# Altium PCB PCB_Uc1.PcbDoc
Units mm, origin at the board's own origin, x right, y up, seen from the top; angles counter-clockwise.
Board outline 100 x 100 mm, 2 copper layers (Top Layer, Bottom Layer); 37 components, 77 nets, 257 pads, 19 vias.
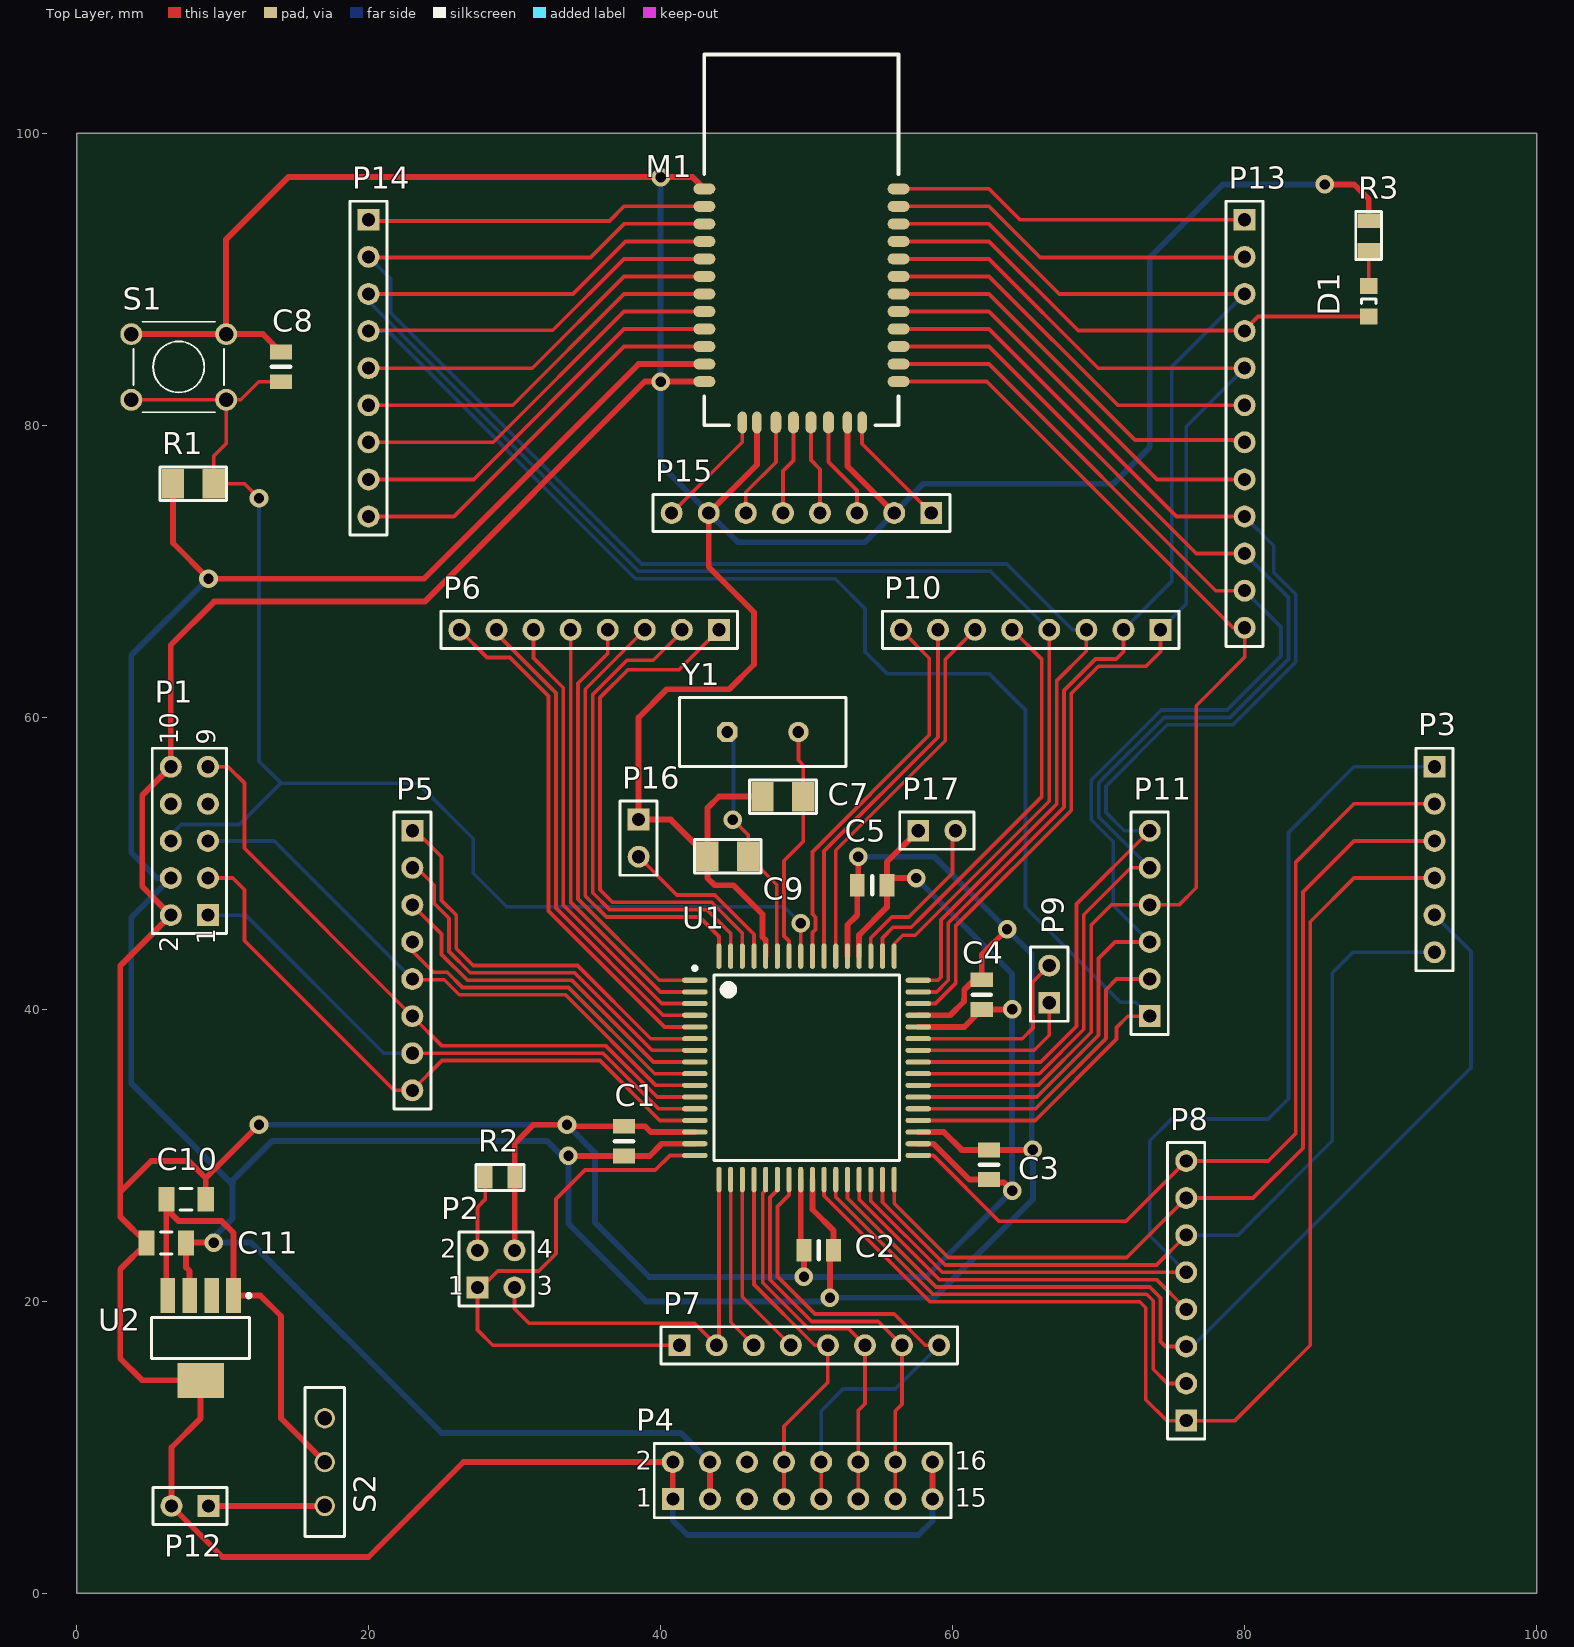
[diagram p0: Top Layer view]
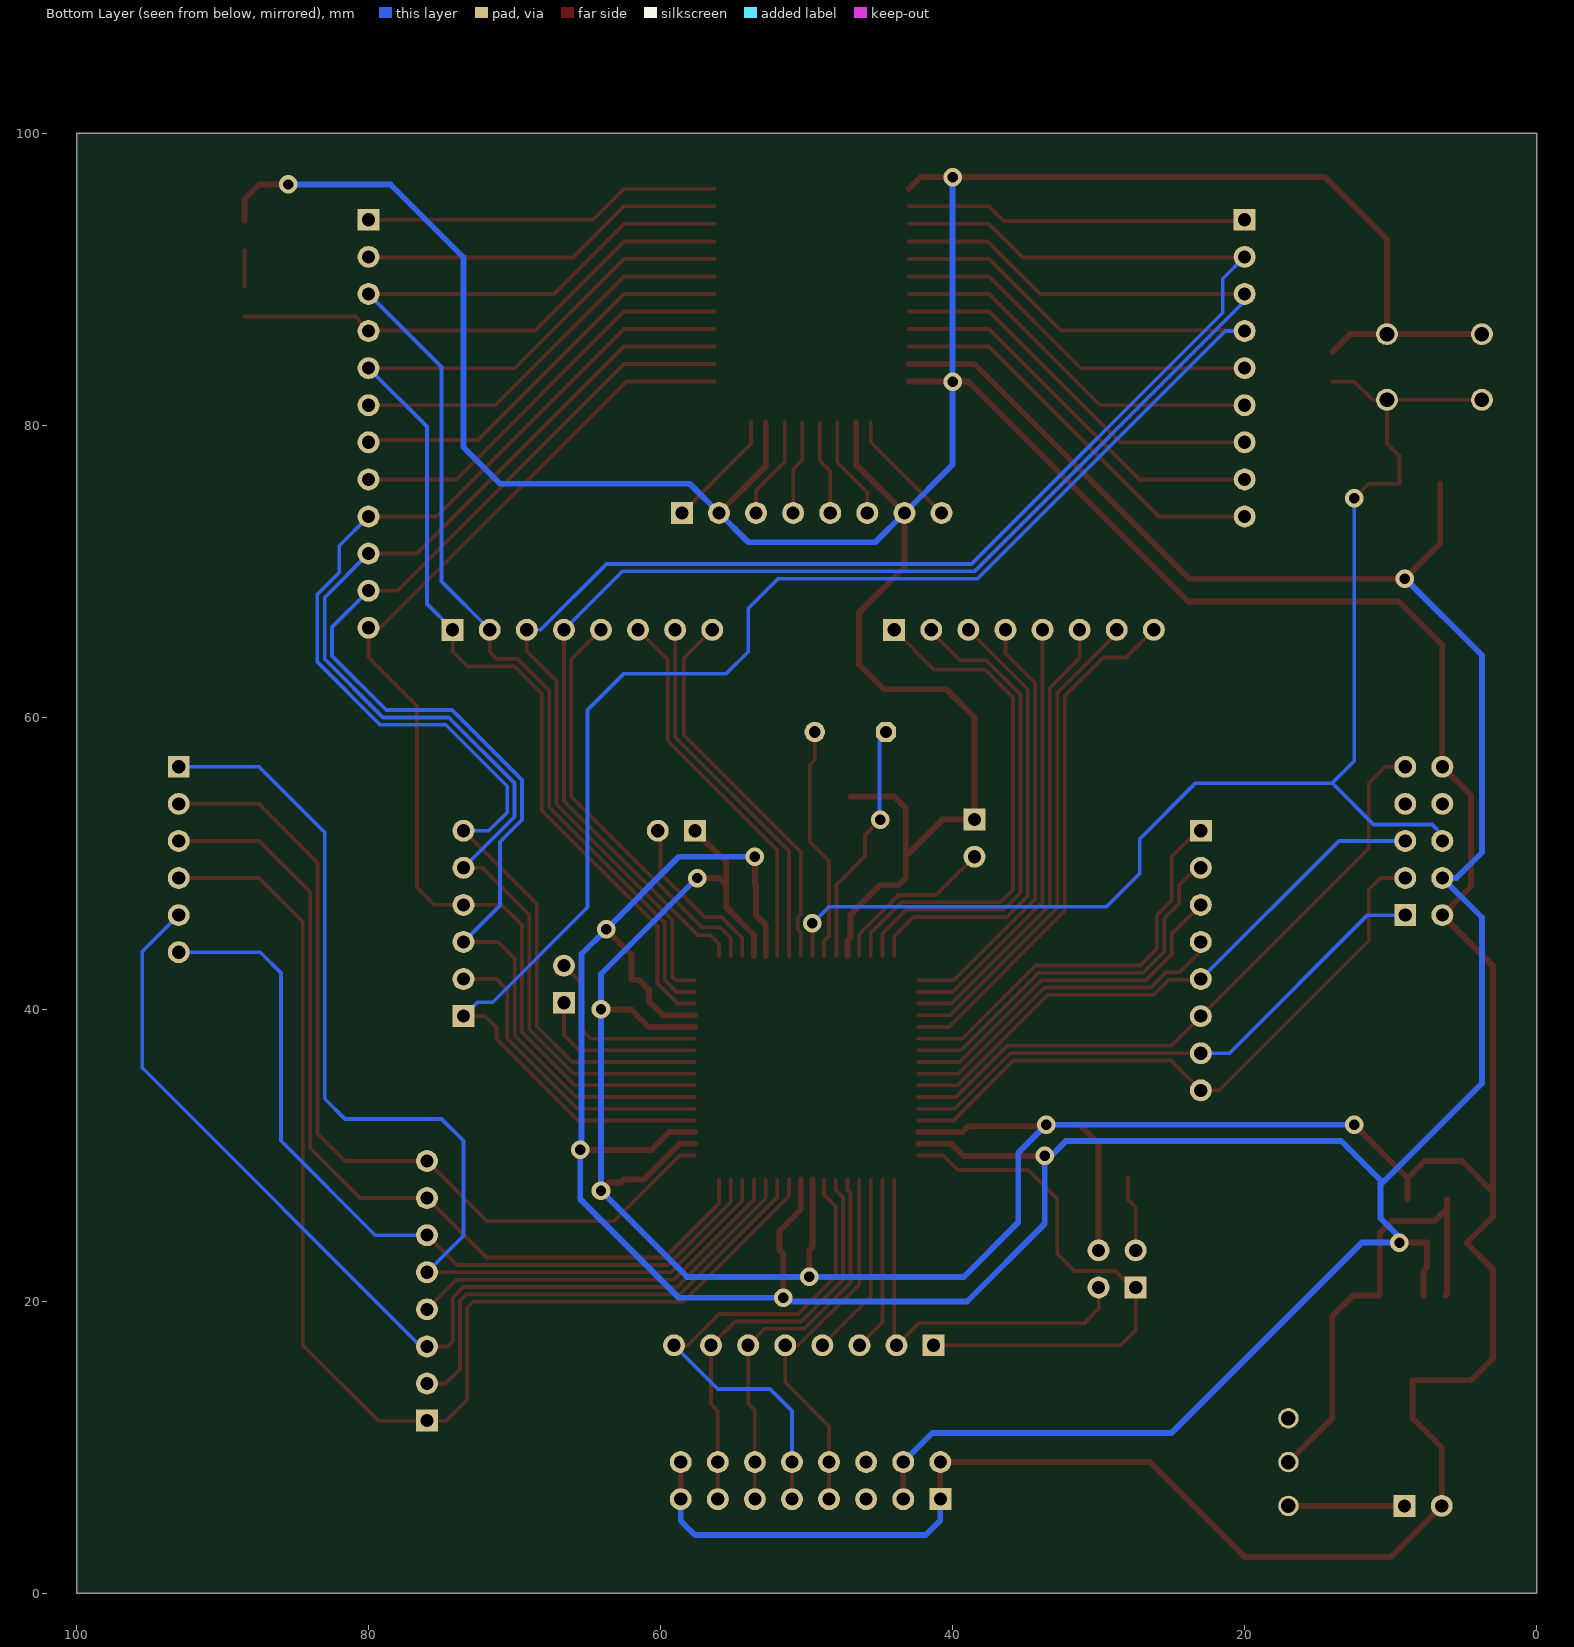
[diagram p1: Bottom Layer view, seen from below]

## Layer stack, top to bottom
Top Solder: solder mask 0.0102, Solder Resist, Dk 3.5
Top Layer: signal copper 0.0356
Dielectric 1: dielectric 0.32, FR-4, Dk 4.8
Bottom Layer: signal copper 0.0356
Bottom Solder: solder mask 0.0102, Solder Resist, Dk 3.5

## Board outline
0,0 100,0 100,100 0,100

## Design rules (kind name [scope] priority, off if disabled: settings)
Clearance Clearance_BL [InNet('GND') vs (InNet('NetM1_35') OR InNet('NetM1_30'))] p1: gap=0.2
Clearance [All] p2: gap=0.25
MinimumSolderMaskSliver [All] p1: minsoldermaskwidth=0.2
PolygonConnect [All] p1: connectstyle=Relief reliefconductorwidth=0.254 reliefentries=4 polygonreliefangle="90 Angle" airgapwidth=0.254
RoutingVias [All] p1: holewidth=0.711 width=1.27 viastyle="Through Hole" minholewidth=0.711 minwidth=1.27 maxholewidth=0.711 maxwidth=1.27
SolderMaskExpansion [All] p1: expansion=0.102
Width Width_Power [(InNet('3V3') OR InNet('GND') OR InNet('BAT') OR InNet('NetP12_1'))] p1: maxlimit=0.4 minlimit=0.3 preferedwidth=0.4
Width [All] p2: maxlimit=0.254 minlimit=0.254 preferedwidth=0.254
29 further rules are at their usual default settings.

## Classes and differential pairs
component class Sheet1: C1 C2 C3 C4 C5 C7 C8 C9 C10 C11 P1 P2 P3 P4 P5 P6 P7 P8 P9 P10 P11 P12 P16 P17 R1 R2 S1 S2 U1 U2 Y1
component class Sheet2: D1 M1 P13 P14 P15 R3

## Components (designator, comment, footprint, x,y, rotation, side; value= is the part's Value field where it differs from the comment)
C1 "0.10µF" SMD-0805C 37.5,30.984 r0 top
C2 "0.10µF" SMD-0805C 50.836,23.516 r90 top
C3 "0.10µF" SMD-0805C 62.5,29.366 r180 top
C4 "0.10µF" SMD-0805C 62,41.016 r180 top
C5 "0.10µF" SMD-0805C 54.484,48.5 r270 top
C7 "10pF" SMD-1206C 48.38,54.576 r270 top
C8 "0.10µF" SMD-0805C 14,84 r0 top
C9 "10pF" SMD-1206C 44.603,50.5 r270 top
C10 "Cap Semi" C1206 7.5,27 r180 top
C11 "Cap Semi" C1206 6.15,24 r180 top
D1 "150080GS75000" 0805_A 88.5,88.5 r270 top
M1 "RN42 Module" RN42-LAND 43,80 r0 top
P1 "JTAG" HDR2X5 9,46.46 r90 top
P2 "Header 2X2" HDR2X2 27.46,20.96 r0 top
P3 "Header 6" HDR1X6 93,56.62 r270 top
P4 "Header 8X2" HDR2X8 40.84,6.46 r0 top
P5 "Header 8" HDR1X8 23,52.24 r270 top
P6 "Header 8" HDR1X8 44,66 r180 top
P7 "Header 8" HDR1X8 41.3,17 r0 top
P8 "Header 8" HDR1X8 76,11.84 r90 top
P9 "Header 2" HDR1X2 66.62,40.46 r90 top
P10 "Header 8" HDR1X8 74.24,66 r180 top
P11 "Header 6" HDR1X6 73.5,39.54 r90 top
P12 "Header 2" HDR1X2 9.04,6 r180 top
P13 "Header 12" HDR1X12 80,94.08 r270 top
P14 "Header 9" HDR1X9 20,94.08 r270 top
P15 "Header 8" HDR1X8 58.54,74 r180 top
P16 "Header 2" HDR1X2 38.5,53 r270 top
P17 "Header 2" HDR1X2 57.65,52.24 r0 top
R1 "10k" SMD-1206-RES 8,76 r270 top
R2 "100" SMD-0805-RES 29,28.5 r270 top
R3 "100" SMD-0805-RES 88.5,93 r180 top
S1 "430156043726" 430156043726 7,84 r0 top
S2 "450301014042" 450301014042 17,9 r90 top
U1 "ATxmega256A3B-AU" 64A_N 50,36 r0 top
U2 "LP38693MP-3.3/NOPB" MP05A_N 8.5,17.5 r270 top
Y1 "ECS-200-20-1" HC-49U 47,59 r0 top

## Footprints (in the part's own frame and the unit in brackets; to place one, negate y for a bottom-side part, rotate by r counter-clockwise, add the part's x,y. Pads: shape width x height; smd on the part's side, far side on the other; paste and mask are expansions set on the pad)
64A_N [mm] "Thin QFP, 64-Leads, Body 14x14mm, Pitch 0.8mm, IPC Medium Density"
  oval 1.75x0.35 smd: 1(-7.65,6) 2(-7.65,5.2) 3(-7.65,4.4) 4(-7.65,3.6) 5(-7.65,2.8) 6(-7.65,2) 7(-7.65,1.2) 8(-7.65,0.4) 9(-7.65,-0.4) 10(-7.65,-1.2) 11(-7.65,-2) 12(-7.65,-2.8) 13(-7.65,-3.6) 14(-7.65,-4.4) 15(-7.65,-5.2) 16(-7.65,-6) 33(7.65,-6) 34(7.65,-5.2) 35(7.65,-4.4) 36(7.65,-3.6) 37(7.65,-2.8) 38(7.65,-2) 39(7.65,-1.2) 40(7.65,-0.4) 41(7.65,0.4) 42(7.65,1.2) 43(7.65,2) 44(7.65,2.8) 45(7.65,3.6) 46(7.65,4.4) 47(7.65,5.2) 48(7.65,6)
  oval 0.35x1.75 smd: 17(-6,-7.65) 18(-5.2,-7.65) 19(-4.4,-7.65) 20(-3.6,-7.65) 21(-2.8,-7.65) 22(-2,-7.65) 23(-1.2,-7.65) 24(-0.4,-7.65) 25(0.4,-7.65) 26(1.2,-7.65) 27(2,-7.65) 28(2.8,-7.65) 29(3.6,-7.65) 30(4.4,-7.65) 31(5.2,-7.65) 32(6,-7.65) 49(6,7.65) 50(5.2,7.65) 51(4.4,7.65) 52(3.6,7.65) 53(2.8,7.65) 54(2,7.65) 55(1.2,7.65) 56(0.4,7.65) 57(-0.4,7.65) 58(-1.2,7.65) 59(-2,7.65) 60(-2.8,7.65) 61(-3.6,7.65) 62(-4.4,7.65) 63(-5.2,7.65) 64(-6,7.65)
  silkscreen extent -7.77,-6.35 6.35,6.95, body extent -7,-7 7,7, height 1.2
0805_A [mm] "Chip LED, 2-Leads, Body 2.0x1.3mm, IPC Medium Density"
  rect 1.1x1.2 smd: 1(-1.05,0) 2(1.05,0)
  silkscreen extent -0.15,-0.5 0.15,0.5, body extent -1,-0.62 1,0.63, height 0.8
430156043726 [mm] "6*6mm vertical type, THT, height 4.3mm, white actuator, 260gf, Bulk"
  round 1.5 hole 1: 1(-3.25,2.25) 2(-3.25,-2.25) 3(3.25,2.25) 4(3.25,-2.25)
  silkscreen extent -3.1,-3.1 3.1,3.1, body extent -3.95,-3.1 3.95,3.1, height 4.3
450301014042 [mm] "THT Mini Slide Switch, body 10x2.5mm"
  round 1.4 hole 1: 1(0,0) 2(-3,0) 3(3,0)
  silkscreen extent -5.1,-1.35 5.1,1.35, body extent -5,-1.25 5,1.25, height 6.43
C1206 [mm] "Chip Capacitor, Body 3.2x1.6mm, IPC High Density"
  rect 1.1x1.7 smd: 1(-1.35,0) 2(1.35,0)
  silkscreen extent -0.4,-0.75 0.4,0.75, body extent -1.7,-0.9 1.7,0.9, height 1.3
HC-49U [mm] "Quartz Crystal, Thru-Hole; 2 Leads; Body 11.35 x 4.65 x 13.46 mm (LxWxH max)"
  oct 1.4x1.4 hole 0.8: 1(-2.44,0)
  round 1.4 hole 0.8: 2(2.44,0)
  silkscreen extent -5.7,-2.35 5.7,2.35
HDR1X2 [mm] "Connector; Header; 2 Position"
  rect 1.5x1.5 hole 0.9: 1(0,0)
  round 1.5 hole 0.9: 2(2.54,0)
  silkscreen extent -1.27,-1.27 3.81,1.27
HDR1X6 [mm] "Connector; Header; 6 Position"
  rect 1.5x1.5 hole 0.9: 1(0,0)
  round 1.5 hole 0.9: 2(2.54,0) 3(5.08,0) 4(7.62,0) 5(10.16,0) 6(12.7,0)
  silkscreen extent -1.27,-1.27 13.97,1.27
HDR1X8 [mm] "Connector; Header; 8 Position"
  rect 1.5x1.5 hole 0.9: 1(0,0)
  round 1.5 hole 0.9: 2(2.54,0) 3(5.08,0) 4(7.62,0) 5(10.16,0) 6(12.7,0) 7(15.24,0) 8(17.78,0)
  silkscreen extent -1.27,-1.27 19.05,1.27
HDR1X9 [mm] "Connector; Header; 9 Position"
  rect 1.5x1.5 hole 0.9: 1(0,0)
  round 1.5 hole 0.9: 2(2.54,0) 3(5.08,0) 4(7.62,0) 5(10.16,0) 6(12.7,0) 7(15.24,0) 8(17.78,0) 9(20.32,0)
  silkscreen extent -1.27,-1.27 21.59,1.27
HDR1X12 [mm] "Connector; Header; 12 Position"
  rect 1.5x1.5 hole 0.9: 1(0,0)
  round 1.5 hole 0.9: 2(2.54,0) 3(5.08,0) 4(7.62,0) 5(10.16,0) 6(12.7,0) 7(15.24,0) 8(17.78,0) 9(20.32,0) 10(22.86,0) 11(25.4,0) 12(27.94,0)
  silkscreen extent -1.27,-1.27 29.21,1.27
HDR2X2 [mm] "Connector; Header; 2x2 Position"
  rect 1.5x1.5 hole 0.9: 1(0,0)
  round 1.5 hole 0.9: 2(0,2.54) 3(2.54,0) 4(2.54,2.54)
  silkscreen extent -1.27,-1.27 3.81,3.81
HDR2X5 [mm] "Connector; Header; 5x2 Position"
  rect 1.5x1.5 hole 0.9: 1(0,0)
  round 1.5 hole 0.9: 2(0,2.54) 3(2.54,0) 4(2.54,2.54) 5(5.08,0) 6(5.08,2.54) 7(7.62,0) 8(7.62,2.54) 9(10.16,0) 10(10.16,2.54)
  silkscreen extent -1.27,-1.27 11.43,3.81
HDR2X8 [mm] "Connector; Header; 8x2 Position"
  rect 1.5x1.5 hole 0.9: 1(0,0)
  round 1.5 hole 0.9: 2(0,2.54) 3(2.54,0) 4(2.54,2.54) 5(5.08,0) 6(5.08,2.54) 7(7.62,0) 8(7.62,2.54) 9(10.16,0) 10(10.16,2.54) 11(12.7,0) 12(12.7,2.54) 13(15.24,0) 14(15.24,2.54) 15(17.78,0) 16(17.78,2.54)
  silkscreen extent -1.27,-1.27 19.05,3.81
MP05A_N [mm] "SOT223, 5-Leads, Body 6.5x3.5mm, Pitch 1.5mm, Lead Span 7mm, IPC Medium Density"
  rect 2.4x1 smd: 1(-2.9,2.25) 2(-2.9,0.75) 3(-2.9,-0.75) 4(-2.9,-2.25)
  rect 2.4x3.2 smd: 5(2.9,0)
  silkscreen extent -3.02,-3.35 1.4,3.43, body extent -1.86,-3.35 1.86,3.35, height 1.8
RN42-LAND [mm] "RN42 Footprint"
  oval 1.5x0.75 smd: 1(0,16.2) 2(0,15) 3(0,13.8) 4(0,12.6) 5(0,11.4) 6(0,10.2) 7(0,9) 8(0,7.8) 9(0,6.6) 10(0,5.4) 11(0,4.2) 12(0,3) 13(13.3,3) 14(13.3,4.2) 15(13.3,5.4) 16(13.3,6.6) 17(13.3,7.8) 18(13.3,9) 19(13.3,10.2) 20(13.3,11.4) 21(13.3,12.6) 22(13.3,13.8) 23(13.3,15) 24(13.3,16.2)
  oval 0.65x1.5 smd: 28(9.8,0.2) 29(3.6,0.2) 30(10.8,0.2) 35(2.6,0.2)
  oval 0.75x1.5 smd: 31(8.5,0.2) 32(7.3,0.2) 33(6.1,0.2) 34(4.9,0.2)
  silkscreen extent 0,0 13.3,25.4
SMD-0805-RES [mil]
  rect 60x40 smd: 1(0,40) 2(0,-40)
  silkscreen extent -35,-65 35,65, body extent -24,-39 26,39, height 31
SMD-0805C [mil]
  rect 60x40 smd: 1(0,40) 2(0,-40)
  silkscreen extent -25,0 25,0, body extent -25,-39 25,39, height 35
SMD-1206-RES [mil]
  rect 80x60 smd: 1(0,55) 2(0,-55)
  silkscreen extent -45,-90 45,90, body extent -34,-66 34,66, height 33
SMD-1206C [mil]
  rect 80x60 smd: 1(0,55) 2(0,-55)
  silkscreen extent -45,-90 45,90, body extent -31,-63 32,63, height 39

## Part data
C1 C2 C3 C4 C5 C8: library part GCD21BR71H104KA01L, "CAP CER 0.1UF 50V X7R 0805"
C7 C9: library part GRM31A7U2J100JW31D, "CAP CER 10PF 630V U2J 1206"
C10 C11: library part GCJ31CR71H225KA12L, "CAP CER 2.2UF 50V X7R 1206"
D1: "SMD mono-color Chip LED, WL-SMCW, Green"
M1: library part RN42MOD
P1: library part "Header 5X2", "Header, 5-Pin, Dual row"
P2: "Header, 2-Pin, Dual row"
P3 P11: "Header, 6-Pin"
P4: "Header, 8-Pin, Dual row"
P5 P6 P7 P8 P10 P15: "Header, 8-Pin"
P9 P12 P16 P17: "Header, 2-Pin"
P13: "Header, 12-Pin"
P14: "Header, 9-Pin"
R1: library part ERJ-8ENF1002V, "RES SMD 10K OHM 1% 1/4W 1206"
R2 R3: library part ERJ-6ENF1000V, "RES SMD 100 OHM 1% 1/8W 0805"
S1: "WS-TATV THT Tact Switch 6X6 mm"
S2: "10x2.5mm THT WS-SLTV"
U1: "8/16-bit AVR XMEGA A3B Microcontroller, 1.6-3.6V, 32MHz, 256KB + 8KB Flash, 4KB EEPROM, 16KB SRAM, 64-pin TQFP, Industrial Grade (-40°C to 85°C), Pb-Free"
U2: "500mA Low Dropout CMOS Linear Regulators Stable with Ceramic Output Capacitors, 5-pin SOT-223, Pb-Free, 1000 Reel"
Y1: "Crystal Oscillator"

## Via types
v1: diameter 1.27, hole 0.711, Top Layer to Bottom Layer, 19 vias

## Nets (pads, with @x,y where several pads share a name; then routed paths per layer and width w, separated by ;. In a path a pad name is that pad's centre, name@x,y a point inside that pad or via, vN(x,y) a via of type N, cw(c..) or ccw(c..) an arc to the next point about the centre after c; other vN are vias at no path point)
3V3: C1.2 C2.2 C3.2 C4.2 C5.2 C11.1 M1.11 P1.4 P4.3 P4.4 R1.2 U1.15 U1.25 U1.35 U1.45 U1.53 U2.3 | length 290.8
  Top Layer w0.4: R1.2 6.603,71.937 v1(9.04,69.5) 23.8,69.5 38.5,84.2 M1.11 ; U2.3 7.75,22.087 7.5,22.337 C11.1 7.529,24.029 v1(9.396,24.029) ; v1(33.693,29.968) C1.2 39.255,29.968 40.087,30.8 U1.15 ; P4.3 P4.4 ; U1.25 50.4,26.3 51.852,24.848 C2.2 51.602,23.266 v1(51.602,20.25) ; U1.53 52.8,45.792 53.468,46.46 C5.2 53.54,48.572 v1(53.54,50.46) ; U1.35 59.4,31.6 60.618,30.382 C3.2 v1(65.5,30.382) ; U1.45 59.84,39.6 60.788,40.548 60.788,40.706 60.8,40.718 60.8,41.348 61.484,42.032 C4.2 62,43.752 v1(63.729,45.481)
  Bottom Layer w0.4: v1(9.04,69.5) 9,69.5 3.75,64.25 3.75,50.75 5.5,49 P1.4 3.75,46.29 3.75,34.945 10.695,28 ; v1@33.469,29.744 32.213,31 13.4,31 10.695,28.295 10.695,28 ; v1(33.693,29.968) 33.693,25.32 39.013,20 51.352,20 v1(51.602,20.25) 58.75,20.25 65.5,27 v1(65.5,30.382) 65.42,30.462 65.42,43.79 v1(63.729,45.481) 58.75,50.46 v1(53.54,50.46) ; P4.4 41.38,11 25,11 11.971,24.029 v1(9.396,24.029) 9.396,24.396 10.695,25.695 10.695,28
ADSCLK: P3.6 P8.6 U1.31 | length 56.7
  Top Layer w0.254: U1.31 55.2,26.8 59.496,22.504 73.964,22.504 P8.6
  Bottom Layer w0.254: P8.6 79.54,24.54 86,31 86,42.5 87.42,43.92 P3.6
ADSCS: P3.1 P8.5 U1.30 | length 75.9
  Top Layer w0.254: U1.30 54.4,26.887 59.287,22 P8.5
  Bottom Layer w0.254: P8.5 73.5,24.5 73.5,31 75,32.5 81.62,32.5 83,33.88 83,52.12 87.5,56.62 P3.1
ADSDRY: P3.4 P8.1 U1.26 | length 85.4
  Top Layer w0.254: U1.26 51.2,27.236 58.452,19.984 72.815,19.984 73.232,19.567 73.232,13.268 74.66,11.84 P8.1 79.34,11.84 84.5,17 84.5,46 87.5,49 P3.4
ADSMISO: P3.3 P8.7 U1.32 | length 62.3
  Top Layer w0.254: U1.32 56,26.713 59.705,23.008 71.928,23.008 P8.7 80.58,27.08 83.996,30.496 83.996,48.036 87.5,51.54 P3.3
ADSMOSI: P3.2 P8.8 U1.33 | length 59.9
  Top Layer w0.254: U1.33 58.684,30 63.184,25.5 71.88,25.5 P8.8 81.62,29.62 83.492,31.492 83.492,50.072 87.5,54.08 P3.2
ADSSTART: P3.5 P8.3 U1.28 | length 69.3
  Top Layer w0.254: U1.28 52.8,27.062 58.87,20.992 73.508,20.992 74.24,20.26 74.24,17.26 74.58,16.92 P8.3
  Bottom Layer w0.254: P8.3 76.42,16.92 95.5,36 95.5,43.96 P3.5
BAT: C10.2 S2.1 U2.1 U2.4 | length 31.3
  Top Layer w0.4: C10.2 C10.2@6.15,26.35 ; U2.4 6.15,20.5 C10.2@6.15,26.35 ; S2.1 14,12 14,19 12.6,20.4 U2.1 10.75,24.697 9.947,25.5 7,25.5 C10.2@6.15,26.35
BL_CTS: M1.16 P11.6 P13.9 U1.41 | length 89.6
  Top Layer w0.254: M1.16 62.5,86.6 75.34,73.76 P13.9 ; U1.41 66.032,36.4 68.484,38.852 68.484,47.224 P11.6
  Bottom Layer w0.254: P11.6 71.76,52.24 70.504,53.496 70.504,55.291 74.709,59.496 79.209,59.496 83.504,63.791 83.504,68.429 82,69.933 82,71.76 P13.9
BL_PCM_CLK: M1.7 P14.6 | length 26.2
  Top Layer w0.254: P14.6 29.88,81.38 37.5,89 M1.7
BL_PCM_IN: M1.9 P14.8 | length 27.3
  Top Layer w0.254: P14.8 27.2,76.3 37.5,86.6 M1.9
BL_PCM_OUT: M1.10 P14.9 | length 27.8
  Top Layer w0.254: P14.9 25.86,73.76 37.5,85.4 M1.10
BL_PCM_SYNC: M1.8 P14.7 | length 26.7
  Top Layer w0.254: P14.7 28.54,78.84 37.5,87.8 M1.8
BL_PIO2: M1.19 P13.6 | length 27.4
  Top Layer w0.254: M1.19 62.5,90.2 71.32,81.38 P13.6
BL_PIO3: M1.20 P10.1 P13.5 U1.46 | length 82.2
  Top Layer w0.254: M1.20 62.5,91.4 69.98,83.92 P13.5 ; U1.46 58.826,40.4 60.208,41.782 60.208,45.708 68.132,53.632 68.132,61.632 70,63.5 73.24,63.5 74.24,64.5 P10.1
  Bottom Layer w0.254: P10.1 76,67.76 76,79.92 P13.5
BL_PIO4: M1.22 P10.2 P13.3 U1.47 | length 84.3
  Top Layer w0.254: M1.22 62.5,93.8 67.3,89 P13.3 ; U1.47 58.913,41.2 59.704,41.991 59.704,45.917 67.628,53.841 67.628,61.841 69.791,64.004 71.204,64.004 71.7,64.5 P10.2
  Bottom Layer w0.254: P10.2 75,69.3 75,84 P13.3
BL_PIO5: D1.2 M1.21 P13.4 | length 35.1
  Top Layer w0.254: M1.21 62.5,92.6 68.6,86.5 79.96,86.5 80.91,87.45 D1.2
BL_PIO6: M1.3 P10.3 P14.2 U1.48 | length 114.6
  Top Layer w0.254: P14.2 20.04,91.5 35.2,91.5 37.5,93.8 M1.3 ; U1.48 59,42 59.2,42.2 59.2,46.126 67.124,54.05 67.124,62.488 69.16,64.524 P10.3
  Bottom Layer w0.254: P14.2 21.5,90.04 21.5,87.713 38.709,70.504 63.71,70.504 68.214,66 P10.3
BL_PIO7: M1.4 P10.4 P14.3 U1.49 | length 108.2
  Top Layer w0.254: P14.3 34,89 37.6,92.6 M1.4 ; U1.49 56,44.491 56.588,45.079 57.441,45.079 66.62,54.258 P10.4
  Bottom Layer w0.254: P14.3 20,88.5 38.5,70 62.62,70 P10.4
BL_RESET: M1.5 P11.1 P14.4 U1.36 | length 126.9
  Top Layer w0.254: P14.4 20.056,86.516 32.616,86.516 37.5,91.4 M1.5 ; U1.36 65.664,32.4 71.232,37.968 71.232,38.772 72,39.54 P11.1
  Bottom Layer w0.254: P14.4 21.327,86.46 38.291,69.496 51.964,69.496 54,67.46 54,64.5 55.5,63 62.5,63 65,60.5 65,47 71.5,40.5 72.54,40.5 P11.1
BL_RTS: M1.15 P11.5 P13.10 U1.40 | length 88.1
  Top Layer w0.254: M1.15 62.5,85.4 76.68,71.22 P13.10 ; U1.40 65.945,35.6 68.988,38.643 68.988,46.488 72.2,49.7 P11.5
  Bottom Layer w0.254: P11.5 70,53.2 70,55.5 74.5,60 79,60 83,64 83,68.22 P13.10
BL_RX: M1.13 P11.4 P13.12 U1.39 | length 78.8
  Top Layer w0.254: M1.13 62.34,83 79.2,66.14 P13.12 80,64.124 76.68,60.804 76.68,48.34 75.5,47.16 P11.4 70.872,47.16 69.492,45.78 69.492,38.434 65.858,34.8 U1.39
BL_SPI_CS: M1.23 P13.2 | length 25.2
  Top Layer w0.254: M1.23 62.5,95 66,91.5 79.96,91.5 P13.2
BL_SPI_MISO: M1.24 P13.1 | length 24.6
  Top Layer w0.254: M1.24 62.5,96.2 64.62,94.08 P13.1
BL_SPI_MOSI: M1.2 P14.1 | length 23.4
  Top Layer w0.254: P14.1 20.08,94 36.5,94 37.5,95 M1.2
BL_SPI_SCK: M1.6 P14.5 | length 25.6
  Top Layer w0.254: P14.5 31.22,83.92 37.5,90.2 M1.6
BL_TX: M1.14 P11.3 P13.11 U1.38 | length 88.2
  Top Layer w0.254: M1.14 62.5,84.2 78.02,68.68 P13.11 ; U1.38 65.77,34 69.996,38.226 69.996,43.496 71.12,44.62 P11.3
  Bottom Layer w0.254: P11.3 71,47.12 71,51.487 69.496,52.991 69.496,55.709 74.291,60.504 78.791,60.504 82.496,64.209 82.496,66.184 P13.11
BL_USB_D+: M1.17 P13.8 | length 28.5
  Top Layer w0.254: M1.17 62.5,87.8 74,76.3 P13.8
BL_USB_D-: M1.18 P13.7 | length 27.9
  Top Layer w0.254: M1.18 62.5,89 72.5,79 79.84,79 P13.7
GND: C1.1 C2.1 C3.1 C4.1 C5.1 C7.2 C8.1 C9.2 C10.1 C11.2 M1.1 M1.12 M1.28 M1.29 P1.2 P1.10 P2.4 P4.1 P4.2 P4.15 P4.16 P12.2 P15.2 P15.7 P16.1 P17.1 R2.1 R3.2 S1.1 S1.3 U1.14 U1.24 U1.34 U1.44 U1.52 U1.60 U2.5 | length 539.2
  Top Layer w0.4: S1.1 S1.3 ; C10.1 8.85,28.45 ; v1(12.5,32.1) 8.85,28.45 ; C8.1 12.766,86.25 S1.3 ; P2.4 30.016,23.516 R2.1 30.016,30.816 31.3,32.1 v1(33.593,32.1) 33.693,32 C1.1 38.935,32 39.335,31.6 U1.14 ; P4.1 P4.2 26.5,9 20,2.5 10,2.5 P12.2 6.5,10 8.5,12 U2.5 4.5,14.6 3,16.1 3,22.2 C11.2 3,25.8 3,27.5 ; M1.12 v1(40,83) 38.919,83 23.846,67.927 9.427,67.927 6.46,64.96 P1.10 4.5,54.66 4.5,48.42 P1.2 3,43 3,27.5 ; M1.1 42.2,97 v1(40,97) 14.5,97 10.25,92.75 S1.3 ; M1.29 46.6,77.3 P15.7 43.3,70.3 46.4,67.2 46.4,63.624 44.702,61.926 40.426,61.926 38.5,60 P16.1 40.706,53 C9.2 ; C7.2 44,54.576 43.206,53.782 C9.2 ; U1.60 47.2,44.738 46.983,44.955 46.983,46.517 44.996,48.504 43.709,48.504 43.206,49.007 C9.2 ; U1.24 49.6,23.736 C2.1 v1(49.82,21.68) ; M1.28 52.8,77.2 P15.2 ; U1.52 53.6,45.1 55.5,47 C5.1 ; v1(57.5,49) 56,49 C5.1 ; U1.34 58.7,30.8 61.15,28.35 C3.1 62.694,28.156 63.504,28.156 v1(64.08,27.58) ; U1.44 60.8,38.8 C4.1 v1(64.08,40) ; P17.1 55.5,50.09 C5.1 ; P4.15 P4.16 ; v1(85.5,96.5) 87.5,96.5 88.5,95.5 R3.2 ; 3,27.5 5.12,29.62 7.68,29.62 8.85,28.45
  Bottom Layer w0.4: v1(12.5,32.1) v1(33.593,32.1) 35.5,30.193 35.5,25.42 39.24,21.68 v1(49.82,21.68) 58.18,21.68 v1(64.08,27.58) v1(64.08,40) 64.08,42.42 v1(57.5,49) ; v1(40,97) v1(40,83) 40,77.3 P15.7 45.3,72 54,72 P15.2 58,76 71,76 73.5,78.5 73.5,91.5 78.5,96.5 v1(85.5,96.5) ; P4.1 40.84,5 41.84,4 57.65,4 58.62,4.97 P4.15
NetC7_1: C7.1 U1.58 Y1.2 | length 16.2
  Top Layer w0.254: U1.58 48.8,44.685 48.46,45.025 48.46,50.183 49.777,51.5 C7.1 49.777,56.723 49.44,57.06 Y1.2
NetC9_1: C9.1 U1.59 Y1.1 | length 16.8
  Top Layer w0.254: v1(44.952,53) 46,51.952 C9.1 47.956,48.544 47.956,43.694 U1.59
  Bottom Layer w0.254: Y1.1 45,58.56 45,53.048 v1(44.952,53)
NetD1_1: D1.1 R3.1 | length 2.4
  Top Layer w0.254: D1.1 R3.1
NetM1_30: M1.30 P15.1 | length 8.2
  Top Layer w0.254: M1.30 53.8,78.74 P15.1
NetM1_31: M1.31 P15.3 | length 7
  Top Layer w0.254: M1.31 51.5,77.5 53.46,75.54 P15.3
NetM1_32: M1.32 P15.4 | length 6.5
  Top Layer w0.254: M1.32 50.3,77.62 50.92,77 P15.4
NetM1_33: M1.33 P15.5 | length 6.5
  Top Layer w0.254: P15.5 48.38,76.88 49.1,77.6 M1.33
NetM1_34: M1.34 P15.6 | length 7.1
  Top Layer w0.254: P15.6 45.84,75.42 47.9,77.48 M1.34
NetM1_35: M1.35 P15.8 | length 8.2
  Top Layer w0.254: P15.8 45.6,78.84 M1.35
NetP2_2: P2.2 R2.2 | length 5.2
  Top Layer w0.254: P2.2 27.46,26.46 27.984,26.984 R2.2
NetP9_1: P9.1 U1.42 | length 11.6
  Top Layer w0.254: U1.42 65.594,37.2 66.62,38.226 P9.1
NetP9_2: P9.2 U1.43 | length 12.9
  Top Layer w0.254: U1.43 64.774,38 65.5,38.726 65.5,39.547 65.493,39.554 65.493,41.873 P9.2
NetP12_1: P12.1 S2.2 | length 8
  Top Layer w0.4: P12.1 S2.2
NetP16_2: P16.2 U1.61 | length 11.6
  Top Layer w0.254: P16.2 41.116,47.844 43.709,47.844 46.4,45.153 U1.61
NetP17_2: P17.2 U1.51 | length 11.7
  Top Layer w0.254: U1.51 54.4,44.9 55.832,46.332 57,46.332 60,49.332 60,52.05 P17.2
PA0: P6.1 U1.62 | length 35.8
  Top Layer w0.254: P6.1 41.27,63.27 37.77,63.27 35.856,61.356 35.856,48.195 36.711,47.34 43.5,47.34 45.6,45.24 U1.62
PA1: P6.2 U1.63 | length 33.8
  Top Layer w0.254: P6.2 41.46,65.872 39.5,63.912 37.699,63.912 35.352,61.565 35.352,47.986 36.502,46.836 43.164,46.836 44.8,45.2 U1.63
PA2: P6.3 U1.64 | length 31.6
  Top Layer w0.254: P6.3 36.834,63.914 36.834,63.912 34.848,61.926 34.848,47.778 36.294,46.332 42.668,46.332 44,45 U1.64
PA3: P6.4 U1.1 | length 29.6
  Top Layer w0.254: P6.4 36.38,64.38 34.344,62.344 34.344,47.569 39.913,42 U1.1
PA4: P6.5 U1.2 | length 29.7
  Top Layer w0.254: P6.5 33.84,47.36 40,41.2 U1.2
PA5: P6.6 U1.3 | length 31.5
  Top Layer w0.254: P6.6 31.3,64.06 33.336,62.024 33.336,47.151 40.087,40.4 U1.3
PA6: P6.7 U1.4 | length 33.3
  Top Layer w0.254: P6.7 28.76,65.74 32.832,61.668 32.832,46.942 40.174,39.6 U1.4
PA7: P6.8 U1.5 | length 36
  Top Layer w0.254: P6.8 28.12,64.1 29.687,64.1 32.328,61.459 32.328,46.734 40.262,38.8 U1.5
PB0: P5.1 U1.6 | length 28.3
  Top Layer w0.254: P5.1 23.216,52.24 25,50.456 25,47.467 26.008,46.459 26.008,44.182 27.174,43.016 34.319,43.016 39.335,38 U1.6
PB1: P5.2 U1.7 | length 26.6
  Top Layer w0.254: P5.2 23.3,49.7 24.496,48.504 24.496,47.258 25.504,46.25 25.504,43.973 26.965,42.512 34.11,42.512 39.422,37.2 U1.7
PB2: P5.3 U1.8 | length 24.6
  Top Layer w0.254: P5.3 25,45.16 25,43.764 26.756,42.008 33.902,42.008 39.51,36.4 U1.8
PB3: P5.4 U1.9 | length 23.4
  Top Layer w0.254: P5.4 23,44 24.456,42.544 25.389,42.544 26.429,41.504 33.693,41.504 39.597,35.6 U1.9
PC0: P2.1 P7.1 U1.16 | length 38
  Top Layer w0.254: P7.1 28.5,17 27.46,18.04 P2.1 27.72,20.96 28.847,22.087 31.65,22.087 32.832,23.269 32.832,27.013 34.819,29 39.642,29 40.642,30 U1.16
PC1: P2.3 P7.2 U1.17 | length 27.8
  Top Layer w0.254: P2.3 30,19.5 31,18.5 42.34,18.5 P7.2 44,17.16 44,20.287 43.996,20.291 43.996,28.346 U1.17
PC2: P7.3 U1.18 | length 12
  Top Layer w0.254: U1.18 44.8,18.58 P7.3
PC3: P7.4 U1.19 | length 12.7
  Top Layer w0.254: U1.19 45.6,20.32 P7.4
PD1: P8.2 U1.27 | length 33.2
  Top Layer w0.254: U1.27 52,27.149 58.661,20.488 73.299,20.488 73.736,20.051 73.736,15.364 74.72,14.38 P8.2
PD3: P8.4 U1.29 | length 26.9
  Top Layer w0.254: U1.29 53.6,26.974 59.078,21.496 73.964,21.496 P8.4
PDI: P10.8 U1.56 | length 26.6
  Top Layer w0.254: U1.56 50.4,45.269 50.612,45.481 50.612,46.319 50.4,46.531 50.4,50.788 58.405,58.793 58.405,64.055 P10.8
PE1: P11.2 U1.37 | length 21.5
  Top Layer w0.254: U1.37 65.683,33.2 70.5,38.017 70.5,41.348 71.232,42.08 P11.2
PF4: P10.5 U1.50 | length 28.4
  Top Layer w0.254: U1.50 55.2,44.9 55.922,45.622 57.162,45.622 57.798,46.258 66.116,54.576 66.116,63.964 P10.5
PF6: P10.6 U1.54 | length 26.3
  Top Layer w0.254: U1.54 52,50.9 59.504,58.404 59.504,63.964 P10.6
PF7: P10.7 U1.55 | length 25.6
  Top Layer w0.254: U1.55 51.2,50.848 59,58.648 P10.7
RESETN: C8.2 P1.6 R1.1 S1.2 S1.4 U1.57 | length 93.1
  Top Layer w0.254: S1.2 S1.4 ; v1(12.5,75) 11.5,76 R1.1 9.397,77.897 10.25,78.75 S1.4 ; C8.2 12.484,82.984 11.25,81.75 S1.4 ; U1.57 v1(49.6,45.9)
  Bottom Layer w0.254: P1.6 6.46,51.96 7.167,52.667 11.167,52.667 14,55.5 ; v1(12.5,75) 12.5,57 14,55.5 ; v1(49.6,45.9) 48.46,47.04 29.46,47.04 27.174,49.326 27.174,51.686 23.36,55.5 14,55.5
SDCS: P4.7 P4.8 P7.5 U1.20 | length 25.8
  Top Layer w0.254: U1.20 46.4,21.167 50.567,17 P7.5 51.46,14.46 48.46,11.46 P4.8 P4.7
SDMISO: P4.13 P4.14 P7.7 U1.22 | length 28.7
  Top Layer w0.254: U1.22 48,27.628 47.5,27.128 47.5,21.493 50.362,18.631 54.909,18.631 P7.7 56.54,12.96 56.08,12.5 P4.14 P4.13
SDMOSI: P4.9 P4.10 P7.8 U1.23 | length 36.4
  Top Layer w0.254: U1.23 48.8,27.3 48.004,26.504 48.004,21.702 50.571,19.135 55.999,19.135 58.134,17 P7.8 ; P4.9 P4.10
  Bottom Layer w0.254: P4.10@51.434,9 P4.10 51,12.5 52.5,14 56.08,14 P7.8
SDSCK: P4.11 P4.12 P7.6 U1.21 | length 26.7
  Top Layer w0.254: U1.21 47.2,27.628 46.996,27.424 46.996,21.284 50.153,18.127 52.873,18.127 P7.6 54,13 53.54,12.54 P4.12 P4.11
TCK: P1.1 P5.7 U1.12 | length 38.8
  Top Layer w0.254: P5.7 36.059,37 39.859,33.2 U1.12
  Bottom Layer w0.254: P1.1 11.58,46.46 21.04,37 P5.7
TDI: P1.9 P5.6 U1.11 | length 45.3
  Top Layer w0.254: P1.9 10.38,56.62 11.5,55.5 11.5,51.04 P5.6 25.036,37.504 36.267,37.504 39.771,34 U1.11
TDO: P1.3 P5.8 U1.13 | length 44
  Top Layer w0.254: P1.3 10.695,49 11.5,48.195 11.5,44.7 21.74,34.46 P5.8 25.036,36.496 35.85,36.496 39.946,32.4 U1.13
TMS: P1.5 P5.5 U1.10 | length 40.3
  Top Layer w0.254: P5.5 23.04,42.04 25.18,42.04 26.22,41 33.484,41 39.684,34.8 U1.10
  Bottom Layer w0.254: P1.5 13.54,51.54 P5.5
pads on no net: P1.7 P1.8 P4.5 P4.6 S2.3 U2.2

## Text inside footprints (layer, text, board x,y; h text height)
P1: Top Overlay "2" at 6.968,43.92 h1.27 r90; Top Overlay "1" at 9.508,44.428 h1.27 r90; Top Overlay "9" at 9.508,58.144 h1.27 r90; Top Overlay "10" at 6.968,58.144 h1.27 r90
P2: Top Overlay "3" at 31.524,20.452 h1.27; Top Overlay "4" at 31.524,22.992 h1.27; Top Overlay "2" at 24.92,22.992 h1.27; Top Overlay "1" at 25.428,20.452 h1.27
P4: Top Overlay "16" at 60.144,8.492 h1.27; Top Overlay "15" at 60.144,5.952 h1.27; Top Overlay "1" at 38.3,5.952 h1.27; Top Overlay "2" at 38.3,8.492 h1.27